# Altium PCB TopBoard.PcbDoc
Units mil, origin at the board's own origin, x right, y up, seen from the top; angles counter-clockwise.
Board outline 3955 x 3530 mil, 2 copper layers (Top Layer, Bottom Layer); 34 components, 66 nets, 235 pads, 45 vias.
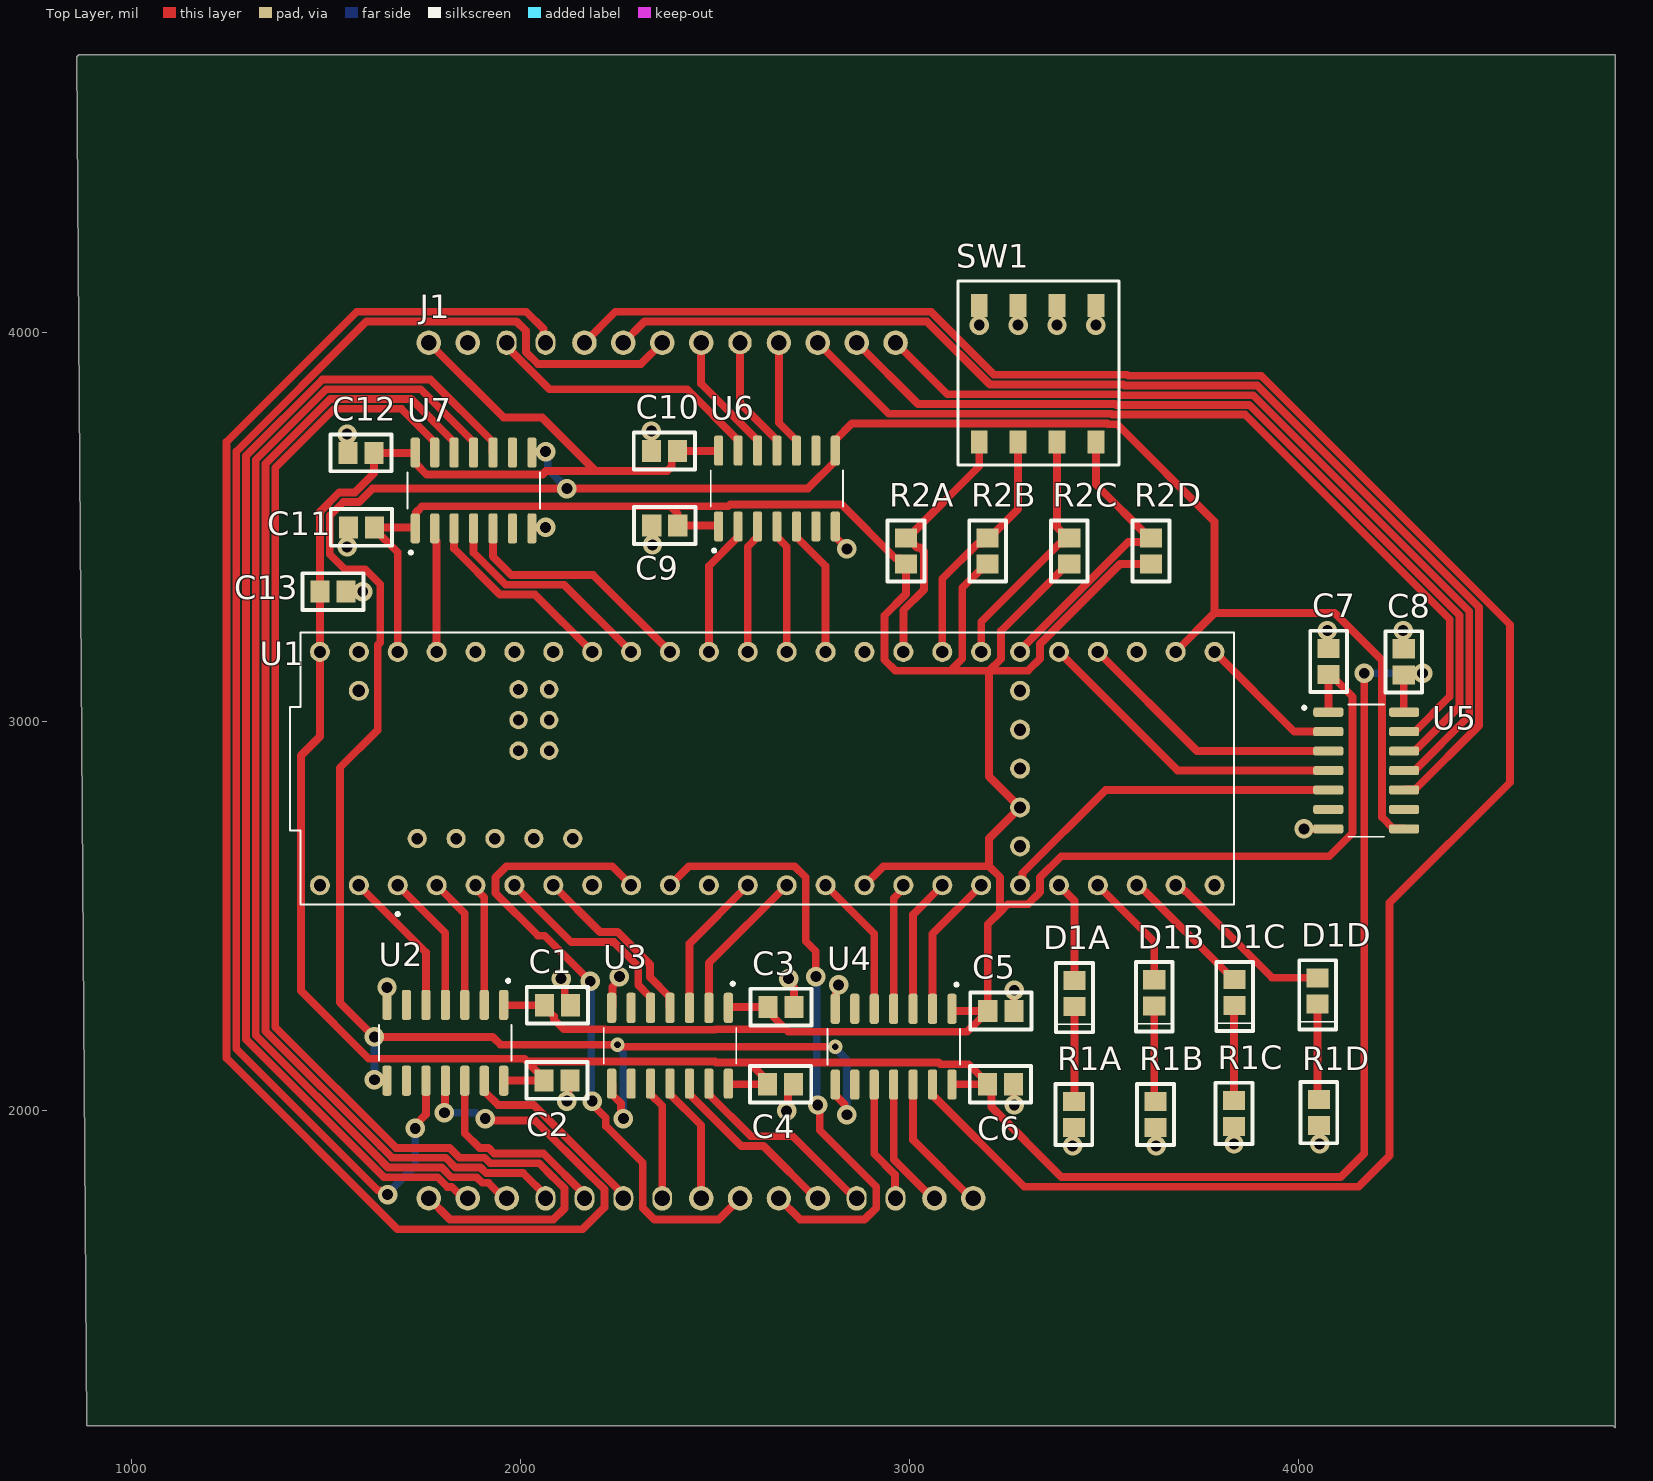
[diagram p0: Top Layer view]
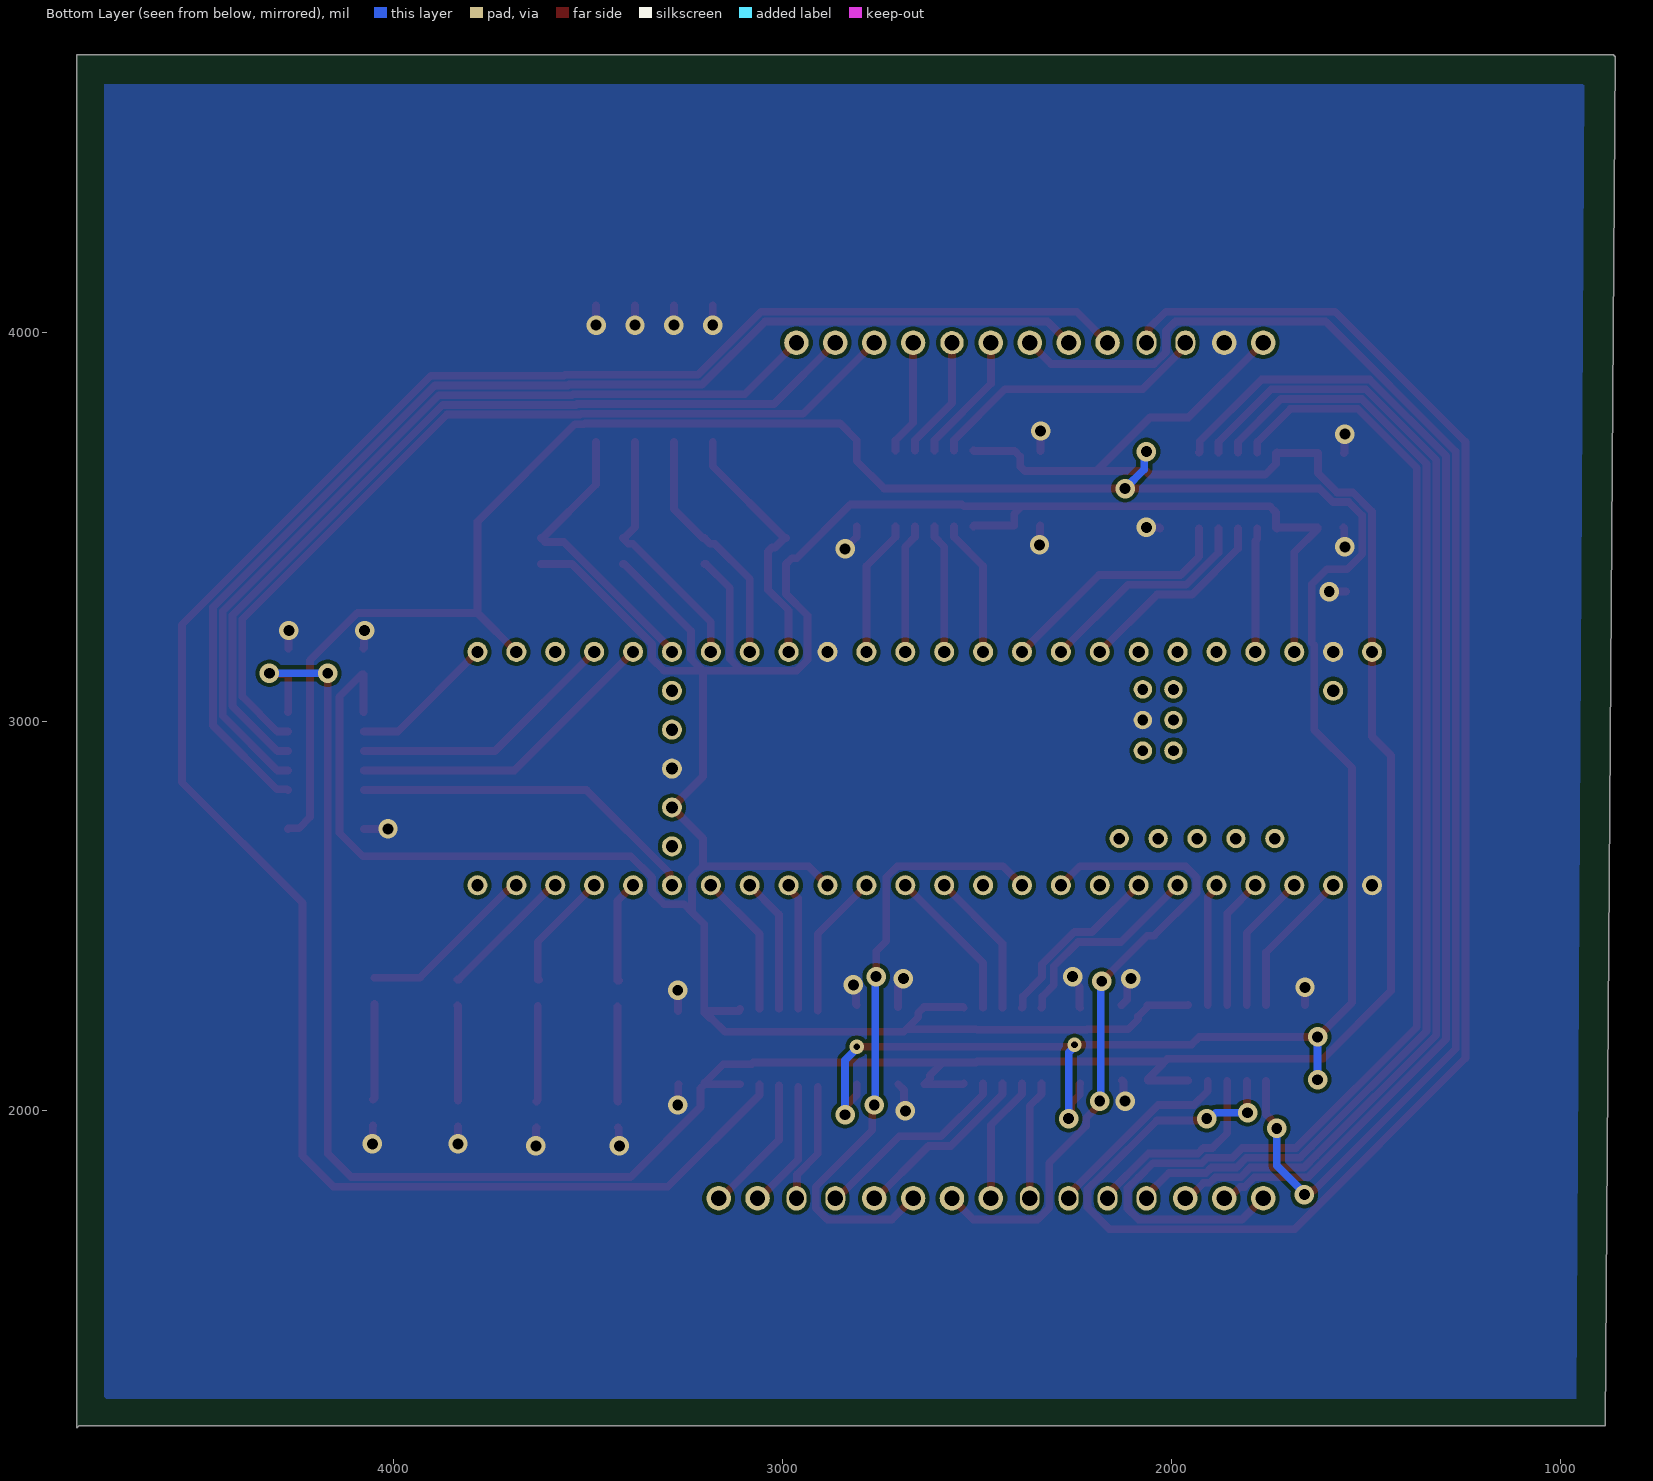
[diagram p1: Bottom Layer view, seen from below]
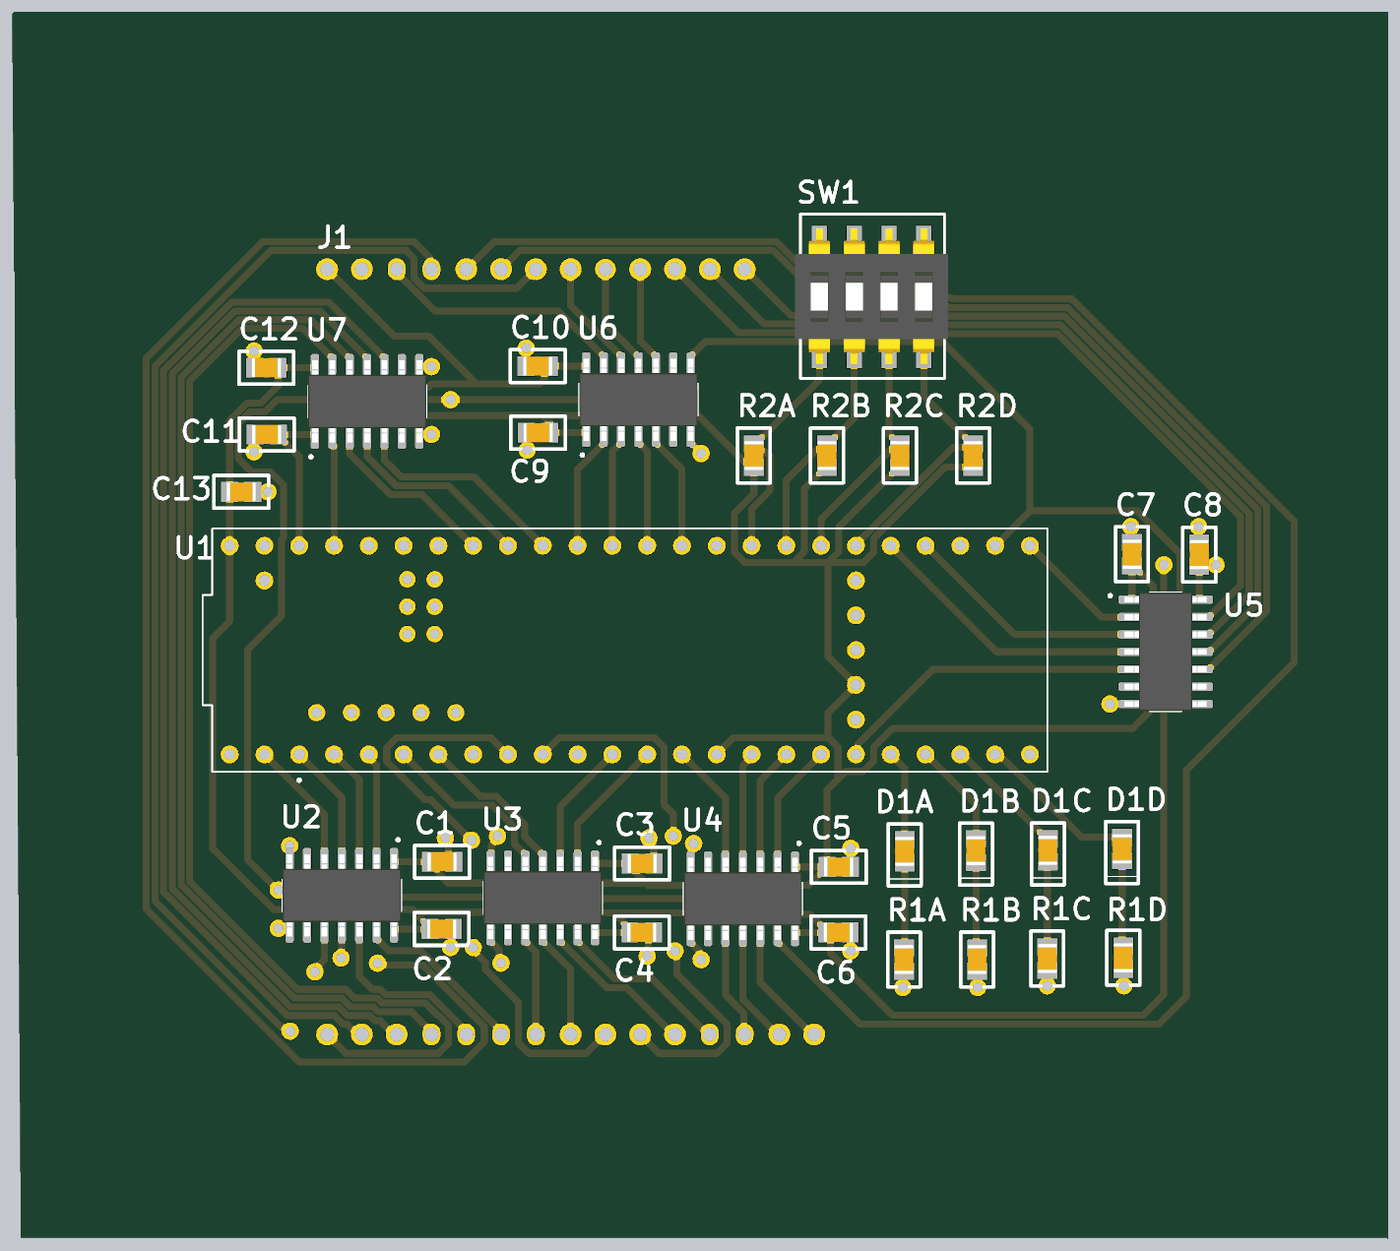
[diagram p2: 3D render of the assembled board from above, using the file's embedded part models]

## Layer stack, top to bottom
Top Solder: solder mask 0.4, Solder Resist, Dk 3.5
Top Layer: signal copper 1.4
Dielectric 1: dielectric 12.6, FR-4, Dk 4.8
Bottom Layer: signal copper 1.4
Bottom Solder: solder mask 0.4, Solder Resist, Dk 3.5

## Board outline
860,4710 865,4715 4815,4715 4815,1185 4810,1190 885,1190

## Design rules (kind name [scope] priority, off if disabled: settings)
BoardOutlineClearance BoardOutlineClearance_JLC [All] p1: gap=7.87 ignorepadtopadclearanceinfootprint=FALSE
Clearance Clearance_JLC [All] p1: gap=10 ignorepadtopadclearanceinfootprint=FALSE except(0: SMDPad-Hole Fill-Hole Poly-Hole Region-Hole Text-Hole; 5: Arc-Arc Arc-Track Track-Track SMDPad-SMDPad Fill-Fill Fill-Poly Fill-Region Poly-Region Region-Region; 5.91: SMDPad-Text THPad-Text Via-Text; 7.87: Arc-SMDPad Track-SMDPad; 12.99: Arc-THPad Track-THPad; 21.26: THPad-THPad THPad-Via THPad-Hole Via-Hole; 39.37: Poly-Poly)
Clearance [All] p2: gap=10 ignorepadtopadclearanceinfootprint=FALSE except(0: Arc-Hole Track-Hole SMDPad-Hole THPad-Hole Via-Hole Fill-Hole Poly-Hole Region-Hole Text-Hole)
HoleSize ViaSize_JLC [IsVia] p1: absolutevalues=TRUE maxlimit=248.03 minlimit=11.81 maxpercent=80.000 minpercent=20.000
HoleSize PadSize_JLC [IsPad] p2: absolutevalues=TRUE maxlimit=250 minlimit=27.56 maxpercent=80.000 minpercent=20.000
HoleSize HoleSize_JLC [All] p3: absolutevalues=TRUE maxlimit=248.03 minlimit=9.84 maxpercent=80.000 minpercent=20.000
HoleSize [All] p4: absolutevalues=TRUE maxlimit=100 minlimit=1 maxpercent=80.000 minpercent=20.000
HoleToHoleClearance HoleToHoleClearance_JLC [All] p1: gap=19.68 allowstackedmicrovias=TRUE
HoleToHoleClearance [All] p2: gap=10 allowstackedmicrovias=TRUE
MinimumAnnularRing MinViaDiam_JLC [IsVia] p1: minimumring=9.06
MinimumAnnularRing PTHDiam_JLC [All] p2: minimumring=5.91
MinimumSolderMaskSliver [All] p1: minsoldermaskwidth=7.87
PlaneClearance PlaneClearance_inPolygon [InPolygon] p1: clearance=39.37
PlaneClearance PlaneClearance_JLC [All] p2: clearance=39.37
PlaneClearance [All] p3: clearance=20
PolygonConnect PolygonConnect_Via [All] p1: connectstyle=Direct reliefconductorwidth=15.75 reliefentries=4 polygonreliefangle="90 Angle" airgapwidth=10
PolygonConnect [All] p2: connectstyle=Relief reliefconductorwidth=10 reliefentries=4 polygonreliefangle="90 Angle" airgapwidth=10
RoutingVias RoutingVias_JLC [All] p1: holewidth=28 width=50 viastyle="Through Hole" minholewidth=0.79 minwidth=17.72 maxholewidth=28 maxwidth=50
RoutingVias [All] p2: holewidth=28 width=50 viastyle="Through Hole" minholewidth=28 minwidth=50 maxholewidth=28 maxwidth=50
SilkToSolderMaskClearance PadToSilk_JLC [IsPad] p1: minsilkscreentomaskgap=5.91 clearancetoexposedcopper=TRUE
SolderMaskExpansion SolderMaskExpansion_JLC [All] p1: expansion=1.97 istentingtop=FALSE
SolderMaskExpansion [All] p2: expansion=4 istentingtop=FALSE
Width Width_JLC_GND [InNet('GND')] p1: maxlimit=216.54 minlimit=5 preferedwidth=10 minimp=50.000000 maximp=50.000000 favimp=50.000000
Width Width_JLC_HighPower [InNetClass('HighPower')] p2: maxlimit=216.54 minlimit=39.37 preferedwidth=129.92 minimp=50.000000 maximp=50.000000 favimp=50.000000
Width Width_JLC_LowPower [InNetClass('LowPower')] p3: maxlimit=78.74 minlimit=10 preferedwidth=59.06 minimp=50.000000 maximp=50.000000 favimp=50.000000
Width Width_JLC_Signal [InNetClass('Signal')] p4: maxlimit=39.37 minlimit=5 preferedwidth=10
Width Width_JLC [All] p5: maxlimit=39.37 minlimit=5 preferedwidth=10
Width [All] p6: maxlimit=10 minlimit=10 preferedwidth=10
25 further rules are at their usual default settings.

## Components (designator, comment, footprint, x,y, rotation, side; value= is the part's Value field where it differs from the comment)
C1 "0.1uF" 0805 2100,2270 r0 top
C2 "0.1uF" 0805 2090,2080 r180 top
C3 "0.1uF" 0805 2675,2265 r0 top
C4 "0.1uF" 0805 2665,2070 r180 top
C5 "0.1uF" 0805 3240,2255 r0 top
C6 "0.1uF" 0805 3230,2070 r180 top
C7 "0.1uF" 0805 4080,3160 r90 top
C8 "0.1uF" 0805 4270,3150 r270 top
C9 "0.1uF" 0805 2367.09,3506.65 r180 top
C10 "0.1uF" 0805 2375,3695 r0 top
C11 "0.1uF" 0805 1587.09,3501.65 r180 top
C12 "0.1uF" 0805 1595,3690 r0 top
C13 "0.1uF" 0805 1522.91,3333.35 r0 top
D1A "Green LED" Diode_0805 3423.35,2297.09 r270 top
D1B "Green LED" Diode_0805 3628.35,2299.02 r270 top
D1C "Green LED" Diode_0805 3835,2300 r270 top
D1D "Green LED" Diode_0805 4048.35,2304.02 r270 top
J1 "TopBoardConnector" TopBoardConnector 2465,2875 r90 top
R1A "100 Ohm" 0805 3425,1995 r90 top
R1B "100 Ohm" 0805 3635,1995 r90 top
R1C "100 Ohm" 0805 3836.65,1997.91 r90 top
R1D "100 Ohm" 0805 4055,2000 r90 top
R2A "10k" 0805 2990,3435 r270 top
R2B "10k" 0805 3200,3435 r270 top
R2C "10k" 0805 3410,3435 r270 top
R2D "10k" 0805 3620,3435 r270 top
SW1 "DIP 4 SWITCH" DS04-254-2-04BK-SMT-TR 3480,3720 r180 top
U1 "DEV-16771" MODULE_DEV-16771 2635,2880 r0 top
U2 "TXS0104EDG4" SOIC127P600X175-14N 1807.44,2175 r270 top
U3 "TXS0104EDG4" SOIC127P600X175-14N 2385,2167.44 r270 top
U4 "TXS0104EDG4" SOIC127P600X175-14N 2960,2165 r270 top
U5 "TXS0104EDG4" SOIC127P600X175-14N 4175,2875 r0 top
U6 "TXS0104EDG4" SOIC127P600X175-14N 2660,3600 r90 top
U7 "TXS0104EDG4" SOIC127P600X175-14N 1880,3595 r90 top

## Footprints (in the part's own frame and the unit in brackets; to place one, negate y for a bottom-side part, rotate by r counter-clockwise, add the part's x,y. Pads: shape width x height; smd on the part's side, far side on the other; paste and mask are expansions set on the pad)
0805 [mm]
  rect 1.25x1.45 smd mask+0.06: 1(-0.963,0.042) 2(0.737,0.042)
  silkscreen extent -2.11,-1.16 1.89,1.24, body extent -1.19,-0.66 0.96,0.74, height 1.25
Diode_0805 [mm]
  rect 1.25x1.45 smd mask+0.06: +(-0.963,0.042) -(0.737,0.042)
  silkscreen extent -2.11,-1.16 2.41,1.27, body extent -1.19,-0.66 0.96,0.74, height 1.25
DS04-254-2-04BK-SMT-TR [mm] "DIP SWITCH, SPST, 2.54 PITCH, FL"
  rect 1.1x1.5 smd mask+0.06: 1(0,0) 2(2.54,0) 3(5.08,0) 4(7.62,0) 5(7.62,-8.9) 6(5.08,-8.9) 7(2.54,-8.9) 8(0,-8.9)
  silkscreen extent -1.5,-10.5 9,1.5, body extent -1.78,-9.42 9.38,0.47, height 4.01
MODULE_DEV-16771 [mm]
  round 1.308 hole 0.8: 0(-26.67,-7.62) 1(-24.13,-7.62) 2(-21.59,-7.62) 3(-19.05,-7.62) 3.3V_1(6.35,-7.62) 3.3V_2(-24.13,7.62) 3.3V_3(16.51,-2.54) 4(-16.51,-7.62) 5(-13.97,-7.62) 6(-11.43,-7.62) 7(-8.89,-7.62) 8(-6.35,-7.62) 9(-3.81,-7.62) 10(-1.27,-7.62) 11(1.27,-7.62) 12(3.81,-7.62) 13(3.81,7.62) 14(1.27,7.62) 15(-1.27,7.62) 16(-3.81,7.62) 17(-6.35,7.62) 18(-8.89,7.62) 19(-11.43,7.62) 20(-13.97,7.62) 21(-16.51,7.62) 22(-19.05,7.62) 23(-21.59,7.62) 24(8.89,-7.62) 25(11.43,-7.62) 26(13.97,-7.62) 27(16.51,-7.62) 28(19.05,-7.62) 29(21.59,-7.62) 30(24.13,-7.62) 31(26.67,-7.62) 32(29.21,-7.62) 33(29.21,7.62) 34(26.67,7.62) 35(24.13,7.62) 36(21.59,7.62) 37(19.05,7.62) 38(16.51,7.62) 39(13.97,7.62) 40(11.43,7.62) 41(8.89,7.62) GND1(-29.21,-7.62) GND2(6.35,7.62) GND3(-26.67,7.62) GND4(16.51,0) ON/OFF(16.51,5.08) PROGRAM(16.51,2.54) VBAT(16.51,-5.08) VIN(-29.21,7.62) VUSB(-26.67,5.08)
  round 1.258 hole 0.75: 5V(-22.86,-4.57) D+(-17.78,-4.57) D-(-20.32,-4.57) USB_GND1(-15.24,-4.57) USB_GND2(-12.7,-4.57)
  round 1.208 hole 0.7: GND5(-14.24,3.17) LED(-16.24,3.17) R+(-16.24,5.17) R-(-14.24,5.17) T+(-14.24,1.17) T-(-16.24,1.17)
  silkscreen extent -31.18,-9.6 30.48,8.89
SOIC127P600X175-14N [mm]
  rrect50% 1.97x0.6 smd: 1(-2.475,3.81) 2(-2.475,2.54) 3(-2.475,1.27) 4(-2.475,0) 5(-2.475,-1.27) 6(-2.475,-2.54) 7(-2.475,-3.81) 8(2.475,-3.81) 9(2.475,-2.54) 10(2.475,-1.27) 11(2.475,0) 12(2.475,1.27) 13(2.475,2.54) 14(2.475,3.81)
  silkscreen extent -4.15,-4.33 1.17,4.33, body extent -3,-4.33 3,4.33, height 1.75
TopBoardConnector [mm]
  round 1.6 hole 1: 0-ADC_SS(27.94,2.54) 5(-27.94,0) 5V(27.94,17.78) 7-UART-RX(-27.94,-2.54) 8-UART-TX(-27.94,-5.08) 10(-27.94,-7.62) 13(27.94,-5.08) 15(27.94,0) 17(-27.94,15.24) 18(-27.94,12.7) 23-INJSW(-27.94,17.78) 24(-27.94,-15.24) 25(-27.94,-17.78) 26-ADC_MOSI(27.94,7.62) 27-ADC_CLK(27.94,5.08) 33(27.94,-7.62) 36(27.94,-10.16) 37(27.94,-12.7) GND(27.94,15.24)
  oval 1.6x1.3 hole 1: 1-ADC_MISO(27.94,10.16) 2(-27.94,7.62) 3(-27.94,5.08) 4(-27.94,2.54) 11(-27.94,-10.16) 12(-27.94,-12.7) 16(27.94,12.7) 19(-27.94,10.16)
  round 1.524 hole 1: 14(27.94,-2.54)

## Part data
C1 C2 C3 C4 C5 C6 C7 C8 C9 C10 C11 C12 C13: library part Cap_0805, "Cap 0805"
D1A D1B D1C D1D: library part "LG R971-KN-1", "Green 570nm LED Indication - Discrete 2.2V 0805 (2012 Metric)"
J1: "Connection to the bottom board"
R1A R1B R1C R1D R2A R2B R2C R2D: library part Res_0805, "Res 0805"
SW1: library part DS04-254-2-04BK-SMT-TR, Manufacturer=CUI, Supplier Part Number 1=2223-DS04-254-2-04BK-SMT-CT-ND, Manufacturer Part Number=DS04-254-2-04BK-SMT-TR, Pricing 1="1=0.66000, 10=0.63400, 25=0.61120, 100=0.52880, 250=0.48176 (USD)", RoHS=Yes, Stock 1=183, Supplier 1=Digi-Key
U1: "RT1062 Teensy 4.1 i.MX ARM Cortex-M7 MPU Embedded Evaluation Board", Package=None, Availability=Unavailable, MP=DEV-16771, Price=None
U2 U3 U4 U5 U6 U7: "4-Bit Bidirectional Voltage-Level Shifter for Open-Drain and Push-Pull Applications 14-SOIC -40 to 85", Package="SOIC-14 Texas Instruments", Availability="In Stock", Check_prices=https://www.snapeda.com/parts/TXS0104EDG4/Texas+Instruments/view-part/?ref=eda, MF="Texas Instruments", MP=TXS0104EDG4, Price=None, Purchase-URL=https://pricing.snapeda.com/search/part/TXS0104EDG4/?ref=eda, SnapEDA_Link=https://www.snapeda.com/parts/TXS0104EDG4/Texas+Instruments/view-part/?ref=snap

## Via types
v1: diameter 50, hole 28, Top Layer to Bottom Layer, 43 vias
v2: diameter 37, hole 17, Top Layer to Bottom Layer, 2 vias

## Nets (pads, with @x,y where several pads share a name; then routed paths per layer and width w, separated by ;. In a path a pad name is that pad's centre, name@x,y a point inside that pad or via, vN(x,y) a via of type N, cw(c..) or ccw(c..) an arc to the next point about the centre after c; other vN are vias at no path point)
0-3.3V: U1.0 U2.5 | length 379
  Top Layer w20: U1.0 1757.44,2407.56 U2.5
0-5V: J1.0-ADC_SS U2.10 | length 3746.7
  Top Layer w20: v1(1659.15,1784.49) 1651.03,1784.49 1640.52,1795 1635,1795 1270,2160 1270,3695 1604.49,4029.49 1990.51,4029.49 2014.59,4005.41 2014.59,3950.8 2044.88,3920.51 2310.51,3920.51 J1.0-ADC_SS ; v1(1730,1955) 1730,1963.12 1757.44,1990.56 U2.10
  Bottom Layer w20: v1(1659.15,1784.49) 1659.15,1788.64 1730,1859.49 v1(1730,1955)
1-3.3V: U1.1 U2.4 | length 358.3
  Top Layer w20: U1.1 1807.44,2457.56 U2.4
1-5V: J1.1-ADC_MISO U2.11 | length 4393.7
  Top Layer w20: v1(1805,1995) 1806.22,1996.22 1806.22,2076.34 U2.11 ; v1(1910,1980) 1915,1975 2038.8,1975 2184.31,1829.49 2185.12,1829.49 2216.42,1798.19 2216.42,1751.81 2160.12,1695.51 1684.49,1695.51 1245,2135 1245,3720 1579.49,4054.49 2015.51,4054.49 2060,4010 2060,3980 J1.1-ADC_MISO
  Bottom Layer w20: v1(1805,1995) 1886.88,1995 1901.88,1980 v1(1910,1980)
2-3.3V: U1.2 U2.3 | length 337.6
  Top Layer w20: U1.2 1857.44,2507.56 U2.3
2-5V: J1.2 U2.12 | length 517.8
  Top Layer w20: U2.12 1857.44,1942.56 1895.51,1904.49 1918.64,1904.49 1933.12,1890 2059.97,1890 2165,1784.97 J1.2
3-3.3V: U1.3 U2.2 | length 316.9
  Top Layer w20: U1.3 1885,2571.48 1907.44,2549.04 U2.2
3-5V: J1.3 U2.13 | length 504.5
  Top Layer w20: U2.13 1907.44,2050.59 1943.03,2015 2034.97,2015 2265,1784.97 J1.3
4-3.3V: U1.4 U3.5 | length 524.5
  Top Layer w20: U1.4 2131.18,2433.82 2241.18,2433.82 2303.41,2371.59 2303.41,2323.44 2333.19,2293.66 2333.19,2266.69 U3.5
4-5V: J1.4 U3.10 | length 324.1
  Top Layer w20: U3.10 2335,2043.03 2365,2013.03 J1.4 ; J1.4@2365,1770 J1.4 ; J1.4@2365,1786.63 J1.4
5-3.3V: U1.5 U3.4 | length 466
  Top Layer w20: U1.5 2205,2460 2250.36,2460 2333.59,2376.76 2333.59,2343.26 2383.19,2293.66 2383.19,2266.69 U3.4
5-5V: J1.5 U3.11 | length 333.1
  Top Layer w20: U3.11 2385,2043.03 2465,1963.03 J1.5@2465,1770
7-3.3V: J1.7-UART-RX U1.7 | length 1682.4
  Top Layer w20: v1(2180,2333.12) 2062.87,2450.24 2045.83,2450.24 1936.26,2559.81 1936.26,2600.19 1964.81,2628.74 2236.26,2628.74 U1.7 ; v1(2185,2025) 2185,2017.22 2220,1982.22 2220,1961.36 2315,1866.36 2315,1750.39 2344.88,1720.51 2510.51,1720.51 J1.7-UART-RX
  Bottom Layer w20: v1(2180,2333.12) 2182.5,2330.62 2182.5,2027.5 v1(2185,2025)
8-3.3V: J1.8-UART-TX U1.8 | length 1590.6
  Top Layer w20: U1.8 2433.74,2628.74 2705.19,2628.74 2733.74,2600.19 2733.74,2436.26 2760,2410 v1(2760,2345) ; J1.8-UART-TX 2719.49,1720.51 2885.12,1720.51 2915,1750.39 2915,1805 2770,1950 2770,2010 v1(2765,2015)
  Bottom Layer w20: v1(2760,2345) 2762.5,2342.5 2762.5,2017.5 v1(2765,2015)
10-3.3V: U1.10 U3.3 | length 377.3
  Top Layer w20: U3.3 2435,2430 U1.10
10-5V: J1.10 U3.12 | length 470.1
  Top Layer w20: U3.12 2435,2043.03 2568.31,1909.72 2625.28,1909.72 J1.10@2765,1770
11-3.3V: U1.11 U3.2 | length 398
  Top Layer w20: U3.2 2485,2380 U1.11
11-5V: J1.11 U3.13 | length 520.1
  Top Layer w20: U3.13 2485,2043.03 2593.31,1934.72 2700.28,1934.72 J1.11@2865,1770
12-3.3V: U1.12 U4.5 | length 373.7
  Top Layer w20: U1.12 2910,2455 U4.5@2910,2258.04
12-5V: J1.12 U4.10 | length 306.9
  Top Layer w20: U4.10@2910,2061.04 2910,1889.64 2963.15,1836.5 2963.15,1778.82 J1.12@2965,1776.97
13-3.3V: U1.13 U6.5 | length 353.6
  Top Layer w20: U6.5 2710,3475.59 2785,3400.59 U1.13
13-5V: J1.13 U6.10 | length 296.2
  Top Layer w20: J1.13 2665,3769.41 2710,3724.41 U6.10
14-3.3V: U1.14 U6.4 | length 332.9
  Top Layer w20: U6.4 2660,3475.59 2685,3450.59 U1.14
14-5V: J1.14 U6.11 | length 316.9
  Top Layer w20: J1.14 2565,3819.41 2660,3724.41 U6.11
15-3.3V: U1.15 U6.3 | length 332.9
  Top Layer w20: U1.15 2585,3450.59 2610,3475.59 U6.3
15-5V: J1.15 U6.12 | length 337.6
  Top Layer w20: J1.15 2465,3869.41 2610,3724.41 U6.12
16-3.3V: U1.16 U6.2 | length 353.6
  Top Layer w20: U1.16 2485,3400.59 2560,3475.59 U6.2
16-5V: J1.16 U6.13 | length 731.6
  Top Layer w20: J1.16 1965,3965.03 2075.03,3855 2429.41,3855 2560,3724.41 U6.13
17-3.3V: U1.17 U7.5 | length 629
  Top Layer w20: U7.5 1930,3425 1977.6,3377.4 2187.6,3377.4 U1.17
17-5V: J1.17 U7.10 | length 3049.1
  Top Layer w20: J1.17 1853.37,1775 1823.88,1804.49 1812.57,1804.49 1787.57,1829.49 1649.8,1829.49 1295,2184.29 1295,3684.29 1490.71,3880 1769.41,3880 1928.19,3721.22 1928.19,3694.25 U7.10
18-3.3V: U1.18 U7.4 | length 573.2
  Top Layer w20: U7.4 1880,3435 1962.6,3352.4 2112.6,3352.4 U1.18
18-5V: J1.18 U7.11 | length 3016.2
  Top Layer w20: U7.11 1880,3719.41 1744.41,3855 1501.07,3855 1320,3673.93 1320,2194.64 1630.61,1884.03 1660.16,1854.49 1797.92,1854.49 1822.92,1829.49 1887.57,1829.49 1902.06,1815 1918.03,1815 1958.03,1775 J1.18
19-3.3V: U1.19 U7.3 | length 517.3
  Top Layer w20: U7.3 1830,3445 1947.6,3327.4 2037.6,3327.4 U1.19
19-5V: J1.19 U7.12 | length 2988
  Top Layer w20: U7.12 1830,3719.41 1719.41,3830 1511.42,3830 1345,3663.58 1345,2205 1640.97,1909.03 1670.51,1879.49 1808.28,1879.49 1833.28,1854.49 1897.92,1854.49 1912.41,1840 2007.87,1840 2065,1782.87 J1.19
23-3.3V: U1.23 U7.2 | length 319.6
  Top Layer w20: U7.2 1780,3470.59 1785,3465.59 U1.23
23-5V: J1.23-INJSW U7.13 | length 3323.4
  Top Layer w20: J1.23-INJSW 1819.49,1720.51 2085.12,1720.51 2113.58,1748.97 2113.58,1801.03 2085.12,1829.49 2084.31,1829.49 2048.8,1865 1922.77,1865 1908.28,1879.49 1843.64,1879.49 1818.64,1904.49 1680.87,1904.49 1370,2215.36 1370,3653.22 1521.78,3805 1694.41,3805 1780,3719.41 U7.13
24-3.3V: U1.24 U4.4 | length 327.9
  Top Layer w20: U4.4 2960,2546.48 2985,2571.48 U1.24
24-5V: J1.24 U4.11 | length 334.7
  Top Layer w20: U4.11@2960,2061.25 2960,1875 J1.24@3065,1770
25-3.3V: U1.25 U4.3 | length 348.6
  Top Layer w20: U4.3 3010,2505 U1.25
25-5V: J1.25 U4.12 | length 359.6
  Top Layer w20: U4.12@3010,2065.42 3010,1925 J1.25@3165,1770
26-3.3V: U1.26 U4.2 | length 369.3
  Top Layer w20: U4.2 3060,2455 U1.26
26-5V: J1.26-ADC_MOSI U4.13 | length 5572.3
  Top Layer w20: J1.26-ADC_MOSI 2244.49,4054.49 3055.87,4054.49 3217.95,3892.4 3560.83,3892.4 3563.24,3890 3905,3890 4545,3250 4545,2845 4235,2535 4235,1885 4155,1805 3295.59,1805 3060,2040.59 U4.13
27-3.3V: U1.27 U5.5 | length 908.7
  Top Layer w20: U1.27 3291.03,2586.03 3291.03,2611.03 3505,2825 U5.5
27-5V: J1.27-ADC_CLK U5.10 | length 3092.2
  Top Layer w20: J1.27-ADC_CLK 2319.49,4029.49 3045.51,4029.49 3207.6,3867.4 3550.48,3867.4 3552.88,3865 3894.64,3865 4465,3294.64 4465,2990.59 4301.22,2826.81 4274.25,2826.81 U5.10
33-3.3V: U1.33 U5.2 | length 377.5
  Top Layer w20: U1.33 3990,2975 U5.2
33-5V: J1.33 U5.13 | length 2272.8
  Top Layer w20: J1.33 2947.6,3792.4 3519.41,3792.4 3521.81,3790 3863.58,3790 4390,3263.58 4390,3065.59 4299.41,2975 U5.13
34-3.3V:OE: U1.34 U2.8 U3.8 U4.8 U5.8 U6.8 U7.8 | length 7342.7
  Top Layer w20: U3.8 2236.81,2068.19 2236.81,2041.22 2259.26,2018.77 2259.26,1985.74 v1(2265,1980) ; v2(2250,2169.73) 2249.73,2170 1949.53,2170 1929.53,2190 v1(1625,2190) 1536.26,2278.74 1536.26,2881.82 1633.74,2979.3 1633.74,3197.67 1640,3203.93 1640,3353.64 1601.14,3392.5 1548.86,3392.5 1510,3431.36 1510,3530.36 1544.75,3565.1 1585.46,3565.1 1620.36,3600 v1(2120,3600) 2739.53,3600 2810,3670.47 2810,3724.41 2852.99,3767.4 3509.06,3767.4 3511.46,3765 3535,3765 3785,3515 3785,3280 ; v2@2250,2170 2254.06,2170 2259.06,2165 2809.73,2165 v2(2810,2164.73) ; U4.8 2810,2040.59 2834.26,2016.33 2834.26,1995.74 v1(2840,1990) ; U1.34 3785,3280 ; U5.8 4270.63,2726.81 4243.66,2726.81 4215.79,2754.68 4215.79,3157.85 4093.64,3280 3785,3280
  Bottom Layer w20: v1(1625,2080) v1(1625,2190) ; v1(2065,3695) 2070.74,3689.26 2070.74,3649.26 v1(2120,3600) ; v2(2250,2169.73) 2250,2165.13 2265,2150.13 v1(2265,1980) ; v2(2810,2164.73) 2810,2160.13 2840,2130.13 v1(2840,1990)
36-3.3V: U1.36 U5.3 | length 698.2
  Top Layer w20: U1.36 3740,2925 U5.3
36-5V: J1.36 U5.12 | length 2264.2
  Top Layer w20: J1.36 3022.6,3817.4 3529.77,3817.4 3532.17,3815 3873.93,3815 4415,3273.93 4415,3040.59 4299.41,2925 U5.12
37-3.3V: U1.37 U5.4 | length 818.9
  Top Layer w20: U1.37 3690,2875 U5.4
37-5V: J1.37 U5.11 | length 2255.6
  Top Layer w20: J1.37 3097.6,3842.4 3540.12,3842.4 3542.52,3840 3884.29,3840 4440,3284.29 4440,3015.59 4299.41,2875 U5.11
+3.3: C1.1 C3.1 C5.1 C7.1 C9.1 C11.1 R2A.2 R2B.2 R2C.2 R2D.2 U1.3.3V_1 U1.3.3V_2 U1.3.3V_3 U2.1 U3.1 U4.1 U5.1 U6.1 U7.1 | length 8198.1
  Top Layer w20: U1.3.3V_2 1685,3436.06 1625,3496.06 C11.1 U7.1@1728.19,3500 ; U7.1 1731.81,3499.37 1731.81,3538.28 1747.74,3554.21 2385.79,3554.21 ; U2.1 1957.56,2272.44 1958.35,2271.65 C1.1 2062.09,2267.72 2086.54,2243.27 2086.54,2235.71 2112.24,2210 2217.47,2210 2219.24,2208.23 2500.76,2208.23 2502.53,2210 2682.24,2210 ; U6.1@2508.19,3505 C9.1 2405,3535 2385.79,3554.21 ; U6.1 U6.1@2510,3503.19 ; U3.1 2536.77,2266.65 C3.1 2651.69,2252.05 2651.69,2240.55 2689.01,2203.23 3148.66,2203.23 3183.54,2238.11 3187.48,2238.11 3202.09,2252.72 C5.1 ; U1.3.3V_1 2933.74,2628.74 3205.19,2628.74 ; U4.1 U4.1@3115.79,2256.65 ; U4.1@3111.81,2256.65 C5.1 ; R2B.2 3197.72,3405.98 3136.26,3344.53 3136.26,3162.33 3105.19,3131.26 ; R2C.2 3407.72,3405.98 3236.26,3234.53 3236.26,3162.33 3205.19,3131.26 ; R2D.2 3542.06,3405.98 3336.26,3200.19 3336.26,3162.33 3305.19,3131.26 3205.19,3131.26 ; U5.1 4078.35,3025.79 C7.1 4082.28,3122.09 4140,3064.37 4140,2715.03 4079.68,2654.72 3390.79,2654.72 3336.26,2600.19 3336.26,2562.33 3305.19,2531.26 3253.7,2531.26 3233.74,2511.3 ; 2385.79,3554.21 2534.68,3554.21 2539.68,3559.21 2825.76,3559.21 2964.38,3420.59 2977.05,3420.59 R2A.2 2991.65,3328.73 2936.26,3273.34 2936.26,3159.81 2964.81,3131.26 3105.19,3131.26 ; 3105.19,3131.26 3205.19,3131.26 ; C5.1 3202.09,2479.64 3233.74,2511.3 ; 3205.19,2628.74 3205.19,2700.19 U1.3.3V_3 3205.19,2859.81 3205.19,3131.26 ; 3205.19,2628.74 3233.74,2600.19 3233.74,2511.3
+5: C2.2 C4.2 C6.2 C8.2 C10.2 C12.2 C13.1 J1.5V U1.VIN U2.14 U3.14 U4.14 U5.14 U6.14 U7.14 | length 7959.7
  Top Layer w20: J1.5V 1957.24,3782.76 2055.76,3782.76 2193.51,3645 ; U2.14 1958.23,2078.35 C2.2 2060.98,2082.28 2024.93,2118.34 2024.93,2120.07 2010.79,2134.21 1610.79,2134.21 1436.26,2308.74 1436.26,2913.76 1485,2962.5 U1.VIN C13.1 1485,3540.71 1534.39,3590.1 1575.1,3590.1 1624.02,3639.02 C12.2 1729.21,3691.65 U7.14 1731.81,3690.63 1731.81,3663.66 1759.68,3635.79 2057.15,3635.79 2066.36,3645 2193.51,3645 ; 2024.93,2126.65 2500.75,2126.65 2503.2,2124.21 3075.76,2124.21 3079.9,2120.07 3153.2,2120.07 3200.98,2072.28 C6.2 ; U6.14 2509.21,3696.65 C10.2 2389.41,3682.05 2389.41,3656.72 2377.69,3645 2193.51,3645 ; U3.14 2536.65,2068.35 C4.2 2621.38,2082.95 2621.38,2091.18 2592.49,2120.07 ; U4.14@3110,2068.35 C6.2 ; v1(4170,3125) 4170,1890.36 4109.64,1830 3391.36,1830 3211.56,2009.8 3211.56,2057.77 C6.2 ; U5.14 4271.65,3025.79 C8.2 4273.66,3122.99 4317.99,3122.99 v1(4320,3125)
  Bottom Layer w20: v1(4170,3125) v1(4320,3125)
GND: C1.2 C2.1 C3.2 C4.1 C5.2 C6.1 C7.2 C8.1 C9.2 C10.1 C11.2 C12.1 C13.2 J1.GND R1A.1 R1B.1 R1C.1 R1D.1 SW1.5 SW1.6 SW1.7 SW1.8 U1.GND1 U1.GND2 U1.GND3 U1.GND4 U1.GND5 U2.7 U3.7 U4.7 U5.7 U6.7 U7.7 | length 1490.2
  Top Layer w20: C13.2 v1(1595,3335) ; v1(1555,3450) 1556.54,3451.54 1556.54,3498.46 C11.2 ; v1(1555,3740) 1556.04,3738.96 1556.04,3692.7 C12.1 ; U2.7 v1(1657.44,2317.56) ; U7.7 2030,3498.19 2031.81,3500 v1(2065,3500) ; v1(2105,2340) 2105,2331.88 2114.41,2322.47 2114.41,2286.26 C1.2 ; v1(2120,2025) 2123.96,2028.96 2123.96,2074.39 C2.1 ; U3.7 2236.81,2266.69 2236.81,2318.69 2255,2336.88 v1(2255,2345) ; C10.1 v1(2337.09,3747.91) ; C9.2 2339.04,3504.04 2339.04,3455.96 v1(2340,3455) ; v1(2685,2000) 2680.47,2004.53 2680.47,2013.86 2688.31,2021.69 2688.31,2053.74 C4.1 ; v1(2690,2340) 2690,2331.88 2704.02,2317.87 C3.2 ; U4.7@2810,2272.44 2811.81,2274.25 2811.81,2309 2818.45,2315.64 v1(2818.45,2323.75) ; U6.7 2810,3475.59 2840,3445.59 v1(2840,3445) ; v1(3180,4020) SW1.5 ; C6.1 3268.96,2067.3 3268.96,2016.04 v1(3270,2015) ; C5.2 3269.51,2257.15 3269.51,2309.51 v1(3270,2310) ; v1(3280,4020) SW1.6 ; v1(3380,4020) SW1.7 ; v1(3420,1910) 3421.67,1911.67 3421.67,1955.41 R1A.1 ; v1(3480,4020) SW1.8 ; R1B.1 3634.17,1956.26 3634.17,1910.83 v1(3635,1910) ; v1(3835,1915) R1C.1 ; v1(4015,2725) U5.7 ; R1D.1 4054.17,1961.26 4054.17,1915.83 v1(4055,1915) ; v1(4075,3235) 4076.67,3233.33 4076.67,3190.69 C7.2 ; v1(4270,3235) 4270.83,3234.17 4270.83,3188.74 C8.1
NetD1A_+: D1A.+ U1.28 | length 265.5
  Top Layer w20: U1.28 3425,2540 D1A.+ D1A.+@3421.06,2335
NetD1A_-: D1A.- R1A.2 | length 244.7
  Top Layer w20: R1A.2 3425,2025.67 D1A.-
NetD1B_+: D1B.+ U1.29 | length 307.1
  Top Layer w20: U1.29 3630,2435 D1B.+ D1B.+@3626.06,2336.93
NetD1B_-: D1B.- R1B.2 | length 247.4
  Top Layer w20: D1B.- 3630,2027.36 R1B.2
NetD1C_+: D1C.+ U1.30 | length 351.9
  Top Layer w20: U1.30 3590.63,2580 3832.72,2337.91 D1C.+
NetD1C_-: D1C.- R1C.2 | length 244.7
  Top Layer w20: R1C.2 3835,2269.33 D1C.-
NetD1D_+: D1D.+ U1.31 | length 463.6
  Top Layer w20: U1.31 3693.52,2580 3707.94,2565.58 3709.42,2565.58 3933.07,2341.93 D1D.+
NetD1D_-: D1D.- R1D.2 | length 247.4
  Top Layer w20: D1D.- 4050,2032.36 R1D.2
NetR2A_1: R2A.1 SW1.4 U1.41 | length 664.3
  Top Layer w20: U1.41 2985,3286.72 3038.07,3339.79 3038.07,3437.99 3027.6,3448.46 3020.04,3448.46 R2A.1@2995.59,3472.91 ; R2A.1 R2A.1@2995.59,3472.91 ; SW1.4 3180,3657.32 R2A.1@2995.59,3472.91
NetR2B_1: R2B.1 SW1.3 U1.40 | length 629.8
  Top Layer w20: U1.40 3085,3367.76 3175.55,3458.31 3187.05,3458.31 R2B.1 3205.59,3472.91 3280,3547.32 SW1.3
NetR2C_1: R2C.1 SW1.2 U1.39 | length 656
  Top Layer w20: U1.39 3185,3257.76 3385.55,3458.31 3397.05,3458.31 R2C.1 3407.72,3472.91 3380,3500.63 SW1.2
NetR2D_1: R2D.1 SW1.1 U1.38 | length 768.6
  Top Layer w20: U1.38 3285,3184.28 3563.11,3462.39 3611.13,3462.39 R2D.1 3617.72,3472.91 3480,3610.63 SW1.1
pads on no net: U1.5V U1.6 U1.9 U1.20 U1.21 U1.22 U1.32 U1.35 U1.D+ U1.D- U1.LED U1.ON/OFF U1.PROGRAM U1.R+ U1.R- U1.T+ U1.T- U1.USB_GND1 U1.USB_GND2 U1.VBAT U1.VUSB U2.6 U2.9 U3.6 U3.9 U4.6 U4.9 U5.6 U5.9 U6.6 U6.9 U7.6 U7.9

## Polygon pours and split planes (outlines as drawn)
GND on Bottom Layer "GND_L02_P000" (solid, pour order 0): 940,4640 4745,4640 4745,1265 4740,1260 960,1260

## Text inside footprints (layer, text, board x,y; h text height)
U1: Mechanical 13 "Teensy 4.1" at 2625.16,2893.39 h50